# Altium PCB CircularLED.PcbDoc
Units mil, origin at the board's own origin, x right, y up, seen from the top; angles counter-clockwise.
Board outline 4251.18 x 4251.18 mil, 2 copper layers (Top Layer, Bottom Layer); 23 components, 17 nets, 61 pads, 0 vias.
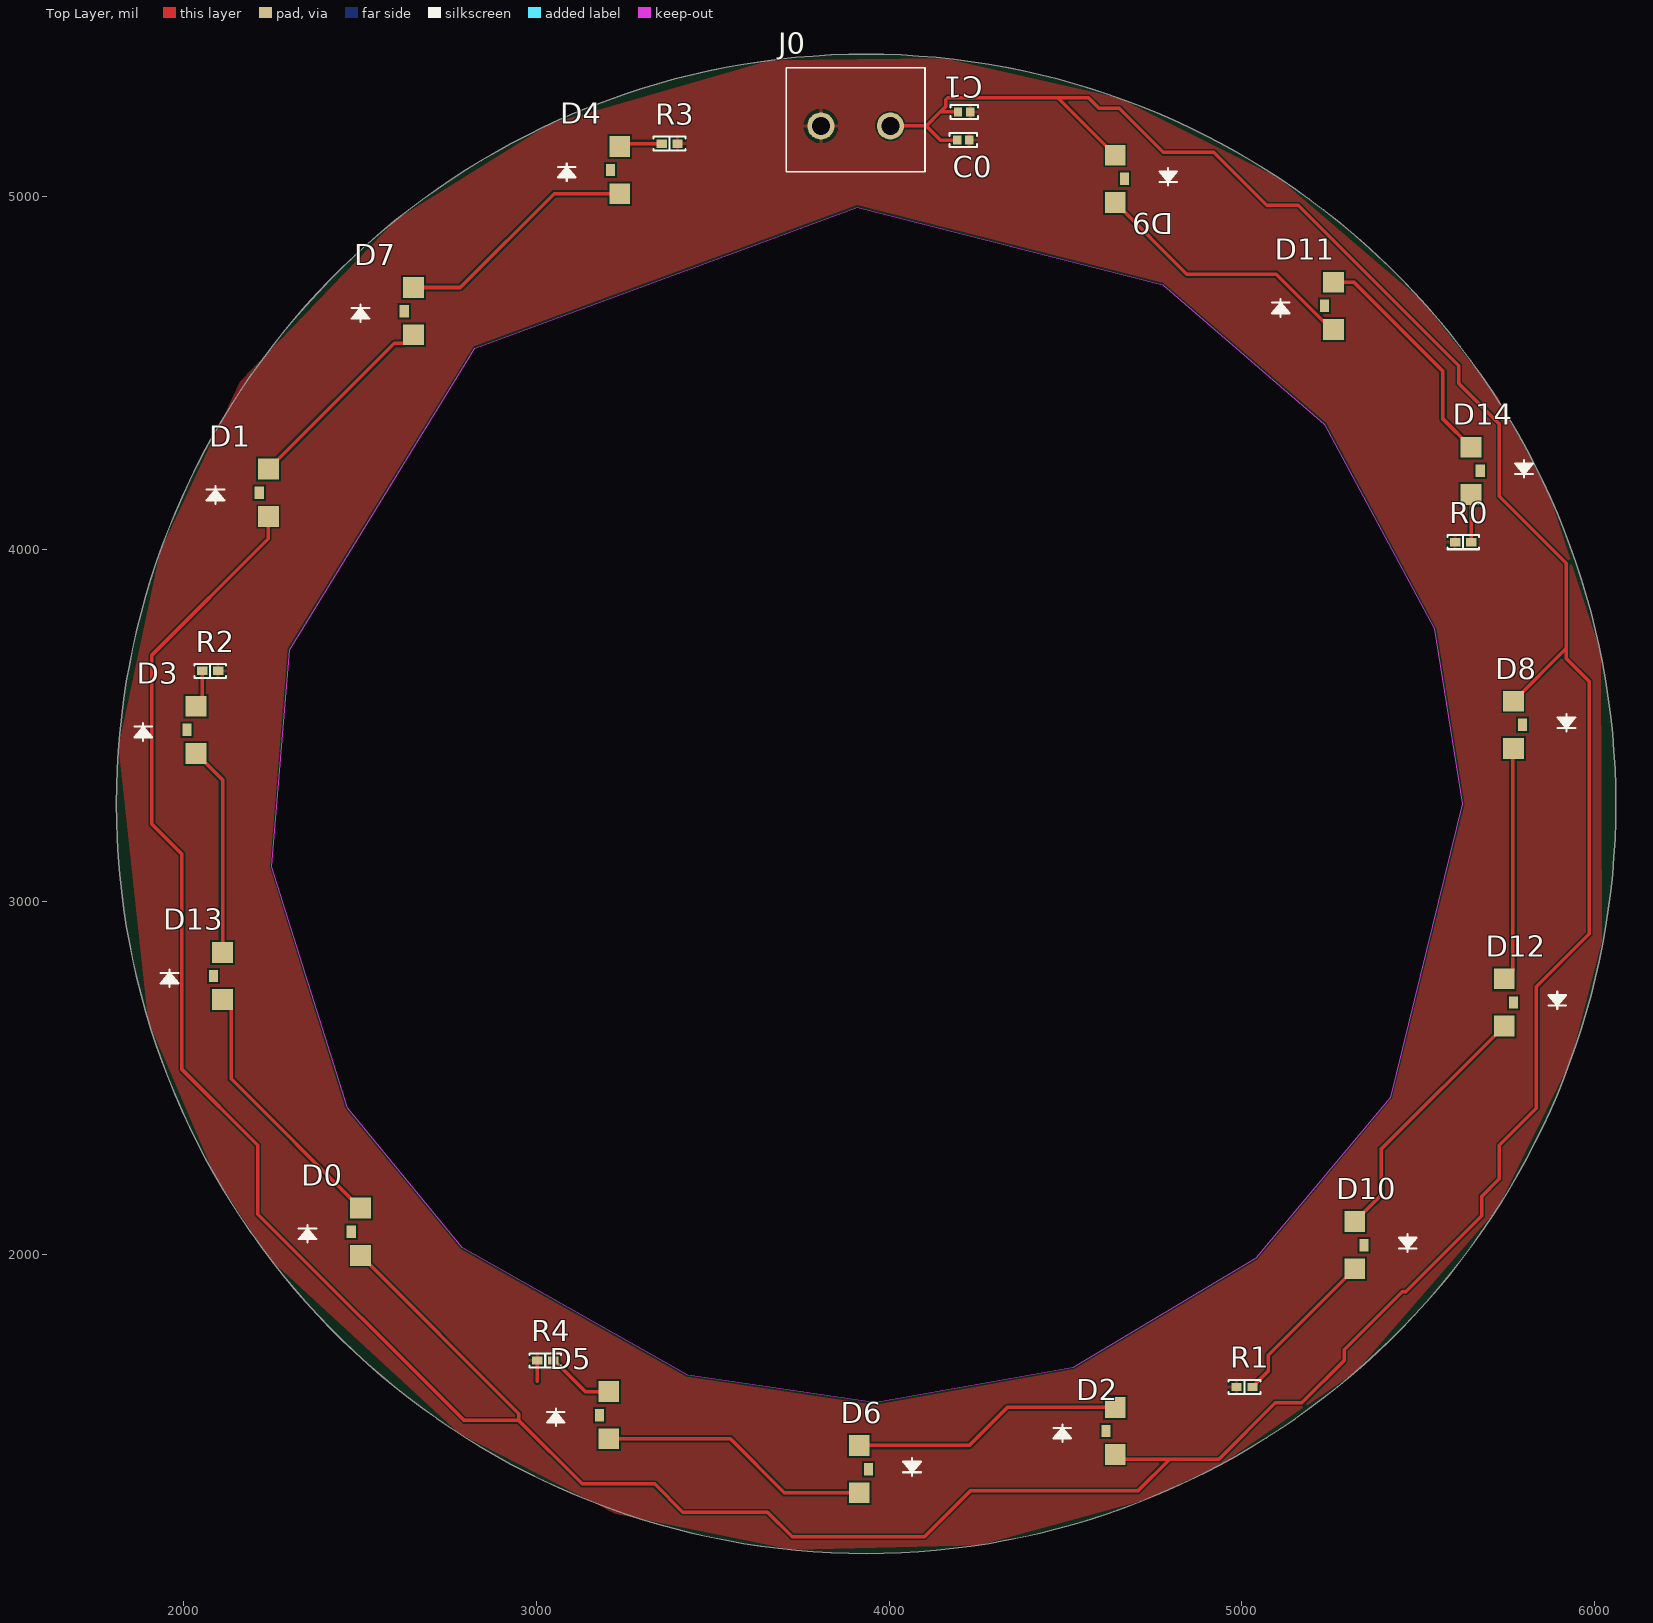
[diagram p0: Top Layer view]
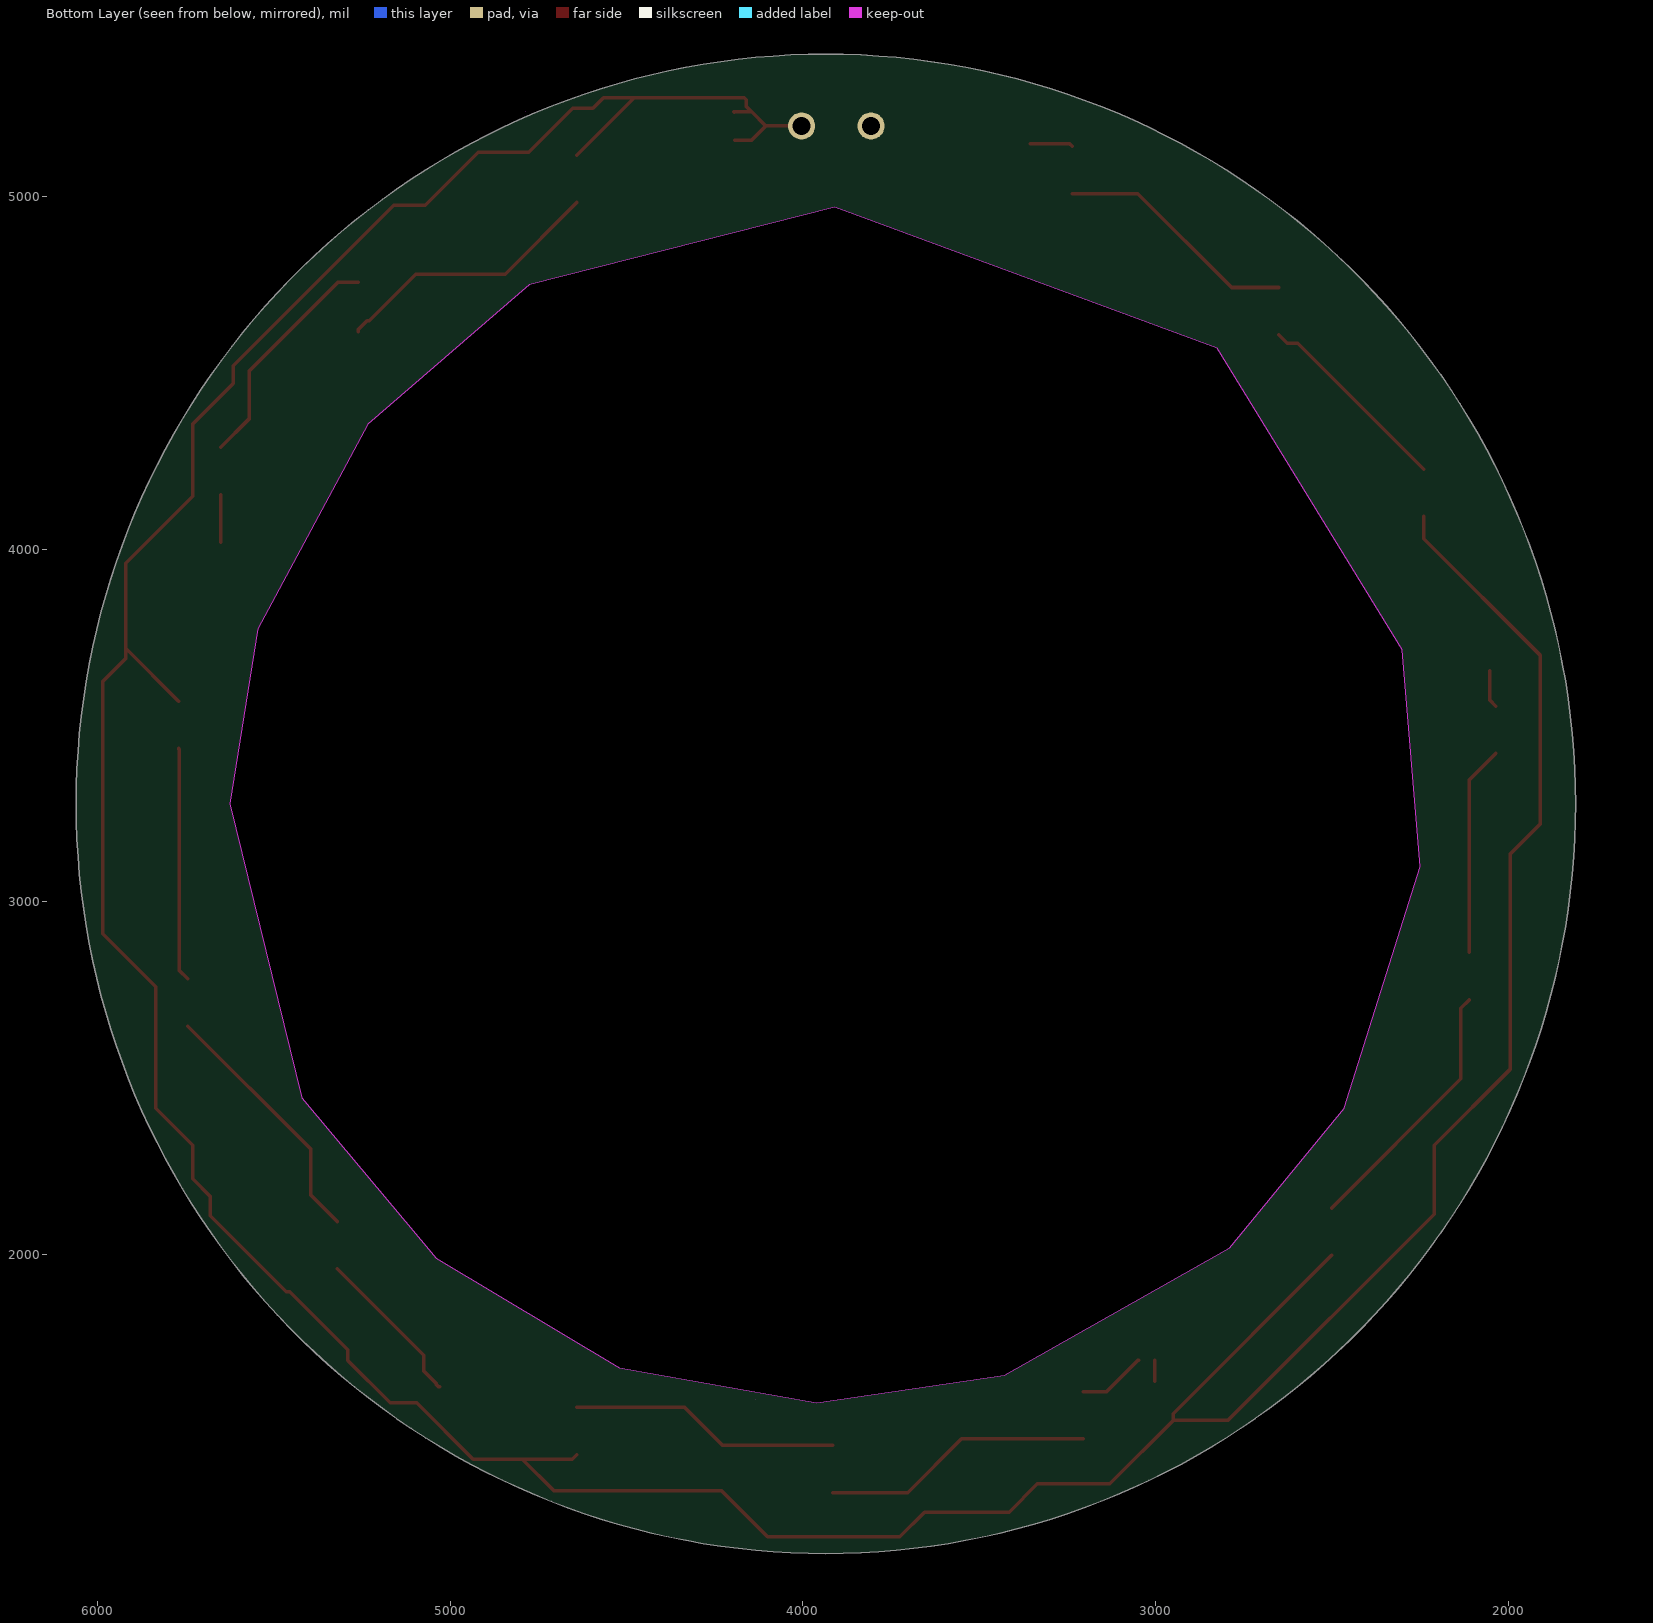
[diagram p1: Bottom Layer view, seen from below]

## Layer stack, top to bottom
Top Solder: solder mask 0.4, Solder Resist, Dk 3.5
Top Layer: signal copper 1.4
Dielectric 1: dielectric 12.6, FR-4, Dk 4.8
Bottom Layer: signal copper 1.4
Bottom Solder: solder mask 0.4, Solder Resist, Dk 3.5

## Board outline
1809.06,3278 ccw(c3934.65,3278) 3934.65,1152.41 ccw(c3934.65,3278) 6060.23,3278 ccw(c3934.65,3278) 3934.65,5403.59 ccw(c3934.65,3278)
cut-out: 3910,4970 4775,4750 5234,4355 5545,3775 5625,3278 5420,2445 5039.76,1990 4520,1680 3960,1580 3428.53,1658.53 2790,2020 2465,2415 2250,3100 2300,3715 2825,4570
cut-out: 4135,1590
cut-out: 4785,5240

## Design rules (kind name [scope] priority, off if disabled: settings)
Clearance [All] p1: gap=5 ignorepadtopadclearanceinfootprint=FALSE
HoleSize [All] p1: absolutevalues=TRUE maxlimit=100 minlimit=6 maxpercent=80.000 minpercent=20.000
HoleToHoleClearance [All] p1: gap=2 allowstackedmicrovias=TRUE
MinimumAnnularRing [All] p1: minimumring=2
PolygonConnect [All] p1: connectstyle=Relief reliefconductorwidth=10 reliefentries=4 polygonreliefangle="90 Angle" airgapwidth=10
RoomDefinition CircularLED [InComponentClass('CircularLED')] p1: confinementstyle=ConfineIn formatcopy=TRUE lockcomponents=FALSE outline 1609.65,1088 6469.65,1088 6469.65,5583 1609.65,5583
RoutingVias [All] p1: holewidth=28 width=50 viastyle="Through Hole" minholewidth=28 minwidth=50 maxholewidth=28 maxwidth=50
SolderMaskExpansion [All] p1: expansion=4
Width [All] p1: maxlimit=50 minlimit=5 preferedwidth=10 minimp=50.000000 maximp=50.000000 favimp=50.000000
28 further rules are at their usual default settings.

## Components (designator, comment, footprint, x,y, rotation, side; value= is the part's Value field where it differs from the comment)
C0 "4.7uF" "CAP 0402/1005" 4210,5160 r180 top
C1 "0.1uF" "CAP 0402/1005" 4212.68,5240 r180 top
D0 "597-2311-407F" LED_597-2311-407F 2501,2065 r0 top
D1 "597-2311-407F" LED_597-2311-407F 2240,4160 r0 top
D2 "597-2311-407F" LED_597-2311-407F 4641,1500 r0 top
D3 "597-2311-407F" LED_597-2311-407F 2035,3488 r0 top
D4 "597-2311-407F" LED_597-2311-407F 3236,5075 r0 top
D5 "597-2311-407F" LED_597-2311-407F 3205,1545 r0 top
D6 "597-2311-407F" LED_597-2311-407F 3915,1392 r180 top
D7 "597-2311-407F" LED_597-2311-407F 2651,4675 r0 top
D8 "597-2311-407F" LED_597-2311-407F 5770,3502 r180 top
D9 "597-2311-407F" LED_597-2311-407F 4641,5050 r180 top
D10 "597-2311-407F" LED_597-2311-407F 5320,2027 r180 top
D11 "597-2311-407F" LED_597-2311-407F 5260,4690 r0 top
D12 "597-2311-407F" LED_597-2311-407F 5744,2715 r180 top
D13 "597-2311-407F" LED_597-2311-407F 2110,2790 r0 top
D14 "597-2311-407F" LED_597-2311-407F 5650,4222 r180 top
J0 "691102710002" 691102710002 3905,5200 r0 top
R0 "200" "RES 0402/1005" 5627.36,4020 r180 top
R1 "200" "RES 0402/1005" 5007.36,1625 r180 top
R2 "200" "RES 0402/1005" 2075,3655 r0 top
R3 "200" "RES 0402/1005" 3377.36,5150 r0 top
R4 "200" "RES 0402/1005" 3025,1700 r180 top

## Footprints (in the part's own frame and the unit in brackets; to place one, negate y for a bottom-side part, rotate by r counter-clockwise, add the part's x,y. Pads: shape width x height; smd on the part's side, far side on the other; paste and mask are expansions set on the pad)
691102710002 [mm]
  round 1.95 hole 1.3: 1(-2.5,0) 2(2.5,0)
  silkscreen extent -5,-3.3 5,4.2
"CAP 0402/1005" [mm] "Chip Capacitor, 2-Leads, Body 1.02x0.51mm, IPC Medium Density"
  rect 0.6x0.64 smd: 1(-0.44,0) 2(0.44,0)
  silkscreen extent -1,-0.5 1,0.5, body extent -0.5,-0.26 0.5,0.26, height 0.52
LED_597-2311-407F [mil]
  rect 59x59 smd: 1(0,67) 2(0,-67)
  rect 26x35 smd: 3(-26,0)
  silkscreen extent -175,-31 -125,19
"RES 0402/1005" [mm] "Chip Resistor, 2-Leads, Body 1.0x0.5mm, IPC Medium Density"
  rect 0.75x0.6 smd: 1(-0.575,0) 2(0.575,0)
  silkscreen extent -1.14,-0.51 1.14,0.51, body extent -0.5,-0.25 0.5,0.25, height 0.35

## Part data
C0: library part C1005X5R1A475K050BC, "CAP CER 4.7UF 10V X5R 0402", Device Package="0402 (1005 Metric)", Manufacturer="TDK Corporation", Supplier Part Number 1=445-13820-2-ND, TemperatureCoefficient=X5R, TemperatureRange="-55C ~ 85C", Tolerance=10%, Voltage=10V, ComponentLink1Description=Datasheet, ComponentLink1URL=https://product.tdk.com/info/en/catalog/datasheets/mlcc_commercial_general_en.pdf, ComponentLink2Description="Digi-Key Listing", ComponentLink2URL=https://www.digikey.com/product-detail/en/tdk-corporation/C1005X5R1A475K050BC/445-13820-2-ND/3951056, PartId=12382, Part Number=C1005X5R1A475K050BC, Price=0.096, Supplier 1=Digi-Key
C1: library part C1005X7R1C104K050BC, "CAP CER 0.1UF 16V X7R 0402", Device Package="0402 (1005 Metric)", Manufacturer="TDK Corporation", Supplier Part Number 1=445-4952-2-ND, TemperatureCoefficient=X7R, TemperatureRange="-55C ~ 125C", Tolerance=10%, Voltage=16V, ComponentLink1Description=Datasheet, ComponentLink1URL=https://product.tdk.com/info/en/catalog/datasheets/mlcc_commercial_general_en.pdf, ComponentLink2Description="Digi-Key listing", ComponentLink2URL=http://digikey.com/product-detail/en/C1005X7R1C104K050BC/445-4952-2-ND/2093220, PartId=3856, Part Number=C1005X7R1C104K050BC, Price=0.0066, Supplier 1=Digi-Key, Type=-
D0 D1 D2 D3 D4 D5 D6 D7 D8 D9 D10 D11 D12 D13 D14: "597 Series Green 2 mm 130° Water Clear 5.2 mcd 2.1 V LED Surface Mount", Package=None, Availability=Unavailable, MF=Dialight, MP=597-2311-407F, Price=None, SnapEDA_Link=https://www.snapeda.com/parts/597-2311-407F/Dialight/view-part/?ref=snap
J0: "Screw terminal 0.33 mm² Number of pins 2 Wuerth Elektronik Blue 1 pc_s_", Package=None, Availability=Unavailable, MF="Wurth Electronics", MP=691102710002, Price=None, SnapEDA_Link=https://www.snapeda.com/parts/691102710002/Wurth%20Electronics%20Inc./view-part/?ref=snap
R0 R1 R2 R3 R4: library part ERJ-2RKF2000X, "RES SMD 200 OHM 1% 1/10W 0402", Device Package="0402 (1005 Metric)", Manufacturer="Panasonic Electronic Components", PowerRating="0.1W, 1/10W", Supplier Part Number 1=P200LTR-ND, TemperatureCoefficient=100ppm/C, TemperatureRange="-55C ~ 155C", Tolerance=1%, ComponentLink1Description=Datasheet, ComponentLink1URL=http://industrial.panasonic.com/www-cgi/jvcr13pz.cgi?E+PZ+3+AOA0002+ERJ2RKF2000X+7+WW, ComponentLink2Description="Digikey listing", ComponentLink2URL=http://digikey.com/product-detail/en/ERJ-2RKF2000X/P200LTR-ND/192215, PartId=12, Part Number=ERJ-2RKF2000X, Price=0.0043, Supplier 1=Digi-Key, Type="Thick Film"

## Nets (pads, with @x,y where several pads share a name; then routed paths per layer and width w, separated by ;. In a path a pad name is that pad's centre, name@x,y a point inside that pad or via, vN(x,y) a via of type N, cw(c..) or ccw(c..) an arc to the next point about the centre after c; other vN are vias at no path point)
GND: C0.1 C1.1 J0.1 R0.2 R1.2 R2.2 R3.2 R4.2 | length 58.9
  Top Layer w10: 3002.36,1641.14 R4.2
NetC0_2: C0.2 C1.2 D0.2 D1.2 D2.2 D8.2 D9.2 J0.2 | length 12555.1
  Top Layer w10: D1.2 2240,4030 1910,3700 1910,3220 1995,3135 1995,2525 2210,2310 2210,2115 2795,1530 2950,1530 ; D0.2 2950,1549 2950,1530 ; J0.2 4105,5200 ; C0.2 4145,5160 4105,5200 ; C1.2@4194.02,5238.66 C1.2 4145,5240 ; D2.2 4654,1420 4795,1420 ; D9.2 4478,5280 ; D8.2 5920,3719 ; 2950,1530 3130,1350 3335,1350 3415,1270 3655,1270 3725,1200 4100,1200 4230,1330 4705,1330 4795,1420 ; 4105,5200 4145,5240 ; 4145,5240 4160,5255 4160,5274.14 4165.86,5280 4478,5280 ; 4478,5280 4565,5280 4595,5250 4652,5250 4777,5125 4920,5125 5070,4975 5160,4975 5615,4520 5615,4470 5730,4355 5730,4150 5920,3960 5920,3719 ; 4795,1420 4935,1420 5095,1580 5170,1580 5290,1700 5290,1730 5455,1895 5464.72,1895 5680,2110.28 5680,2165 5730,2215 5730,2310 5835,2415 5835,2760 5985,2910 5985,3625 5920,3690 5920,3719
NetD0_1: D0.1 D13.2 | length 753
  Top Layer w10: D13.2 2134.5,2698.5 2134.5,2498.5 D0.1
NetD1_1: D1.1 D7.2 | length 568.8
  Top Layer w10: D1.1 2596.5,4583.5 2626.5,4583.5 D7.2
NetD2_1: D2.1 D6.2 | length 770.7
  Top Layer w10: D6.2 4227.32,1459 4335.32,1567 D2.1
NetD3_1: D3.1 R2.1 | length 107.2
  Top Layer w10: D3.1 2052.36,3572.36 R2.1
NetD3_2: D3.2 D13.1 | length 595.1
  Top Layer w10: D3.2 2110,3346 D13.1
NetD4_1: D4.1 R3.1 | length 122
  Top Layer w10: D4.1 3244,5150 R3.1
NetD4_2: D4.2 D7.1 | length 695.2
  Top Layer w10: D7.1 2784,4742 3050,5008 D4.2
NetD5_1: D5.1 R4.1 | length 193.8
  Top Layer w10: R4.1 3050.59,1700 3138.59,1612 D5.1
NetD5_2: D5.2 D6.1 | length 773.4
  Top Layer w10: D5.2 3550,1478 3703,1325 D6.1
NetD8_1: D8.1 D12.2 | length 663.8
  Top Layer w10: D12.2 5768.5,2806.5 5768.5,3433.5 D8.1
NetD9_1: D9.1 D11.2 | length 774.1
  Top Layer w10: D9.1 4844,4780 5097,4780 5229.5,4647.5 5235.5,4647.5 D11.2 D11.2@5260,4617
NetD10_1: D10.1 R1.1 | length 456.9
  Top Layer w10: R1.1 5032.95,1625 5039.76,1631.81 5039.76,1634.76 5075,1670 5075,1715 D10.1
NetD10_2: D10.2 D12.1 | length 730.2
  Top Layer w10: D10.2 5395,2169 5395,2300 5396,2300 D12.1
NetD11_1: D11.1 D14.2 | length 663.5
  Top Layer w10: D11.1 5318,4757 5570,4505 5570,4369 D14.2
NetD14_1: D14.1 R0.1 | length 135
  Top Layer w10: R0.1 D14.1
pads on no net: D0.3 D1.3 D2.3 D3.3 D4.3 D5.3 D6.3 D7.3 D8.3 D9.3 D10.3 D11.3 D12.3 D13.3 D14.3

## Polygon pours and split planes (outlines as drawn)
GND on Top Layer (solid, pour order 16): 3724.78,1162.8 4255.49,1176.77 4726.79,1305.53 4945,1407.89 5324.9,1670.11 5723.98,2130.65 5932.07,2551.07 6020,2890 6016.83,3705.37 5869.7,4157.59 5723.98,4432.76 5512.5,4702.26 5103.15,5053.59 4649.87,5279.64 4154.7,5392.17 3664.82,5386.39 3039.56,5205.94 2603.74,4935.35 2160,4475 1932.77,3992.58 1815.27,3440.36 1899.42,2664.83 2089.57,2222.62 2245,1987 2782.79,1491.57 3225,1265
GND on Top Layer (solid, pour order 10): 5970,1660

## Other copper
Top Layer:
  pour cut-out: 1695,3180 1695,1115 2375,1115 2385,1105

## Text inside footprints (layer, text, board x,y; h text height)
J0: Mechanical 4 "1" at 3760.84,5095.37 h73.82; Mechanical 4 "1" at 3760.84,5095.37 h73.82